# Altium PCB Bluetooth_tag_station.PcbDoc
Units mm, origin at the board's own origin, x right, y up, seen from the top; angles counter-clockwise.
Board outline 82 x 61.1 mm, 2 copper layers (Top Layer, Bottom Layer); 77 components, 55 nets, 281 pads, 208 vias.
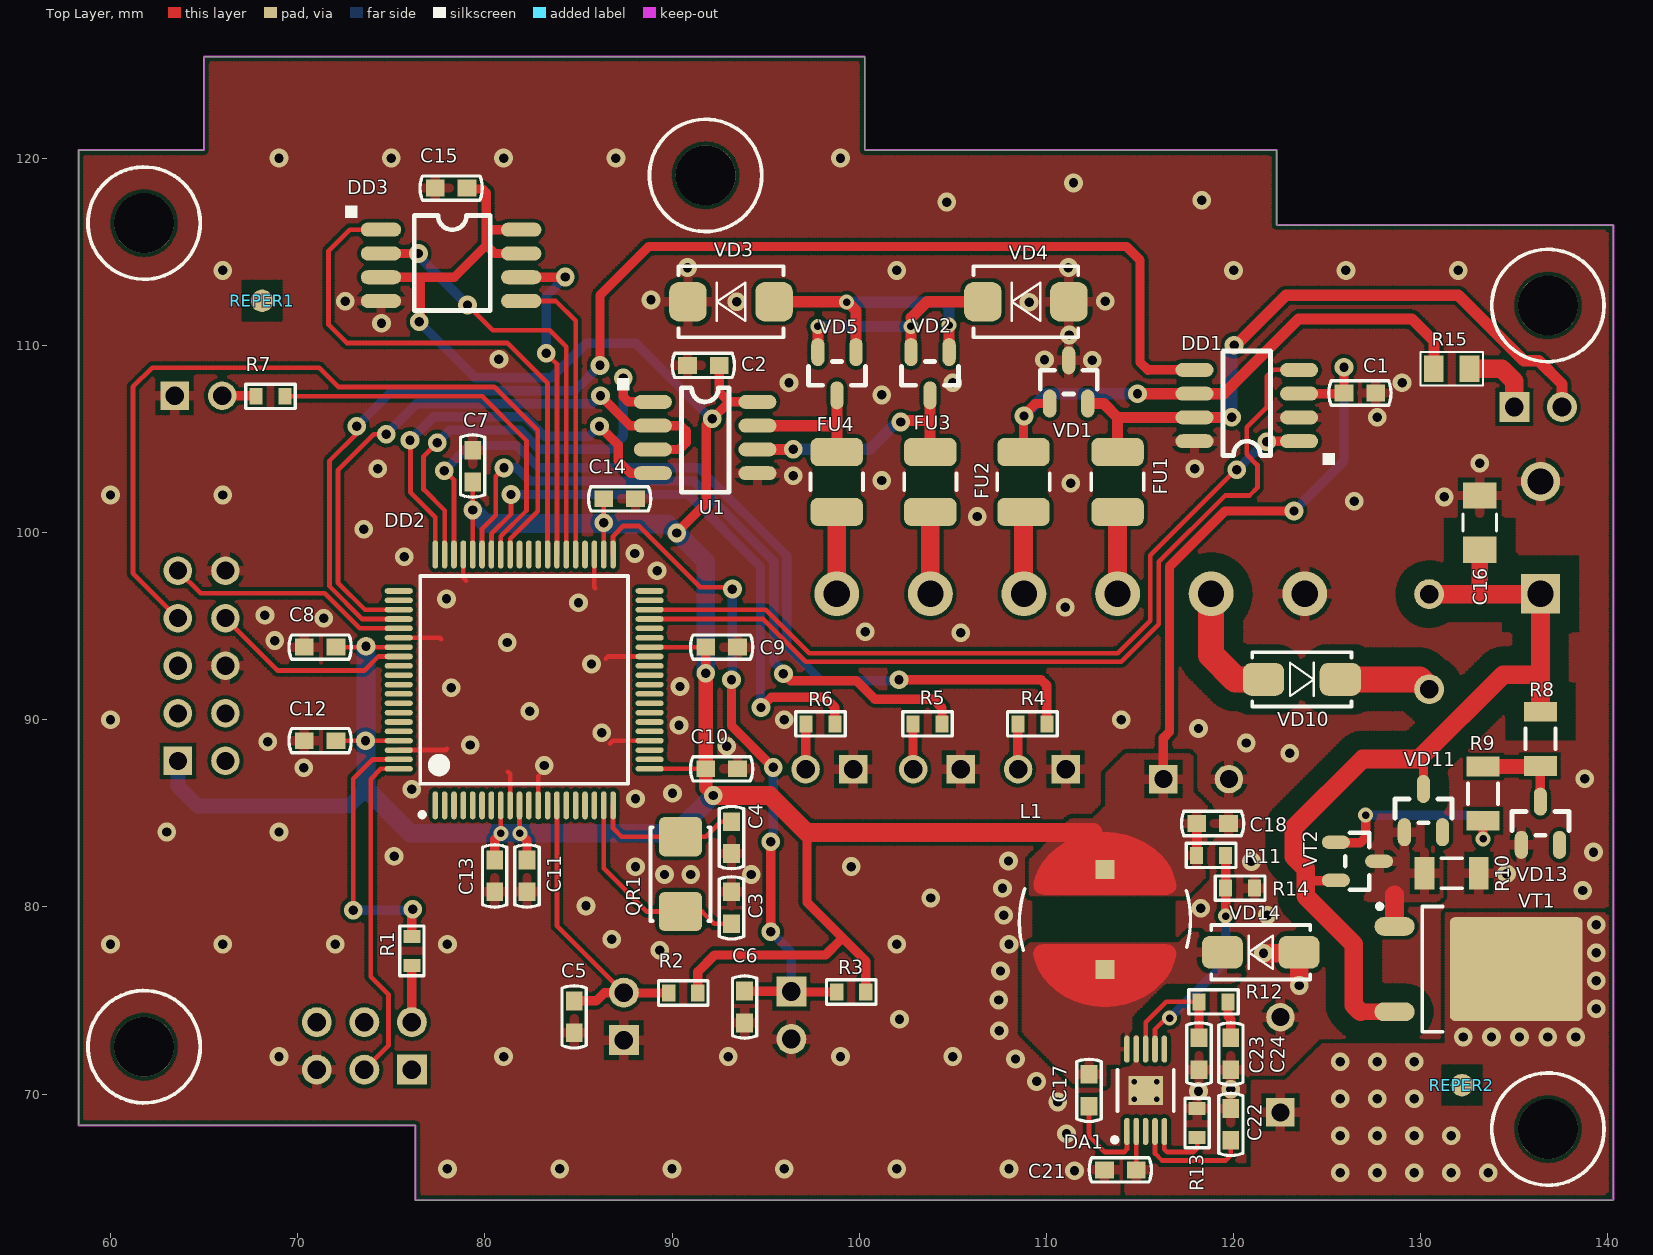
[diagram p0: Top Layer view]
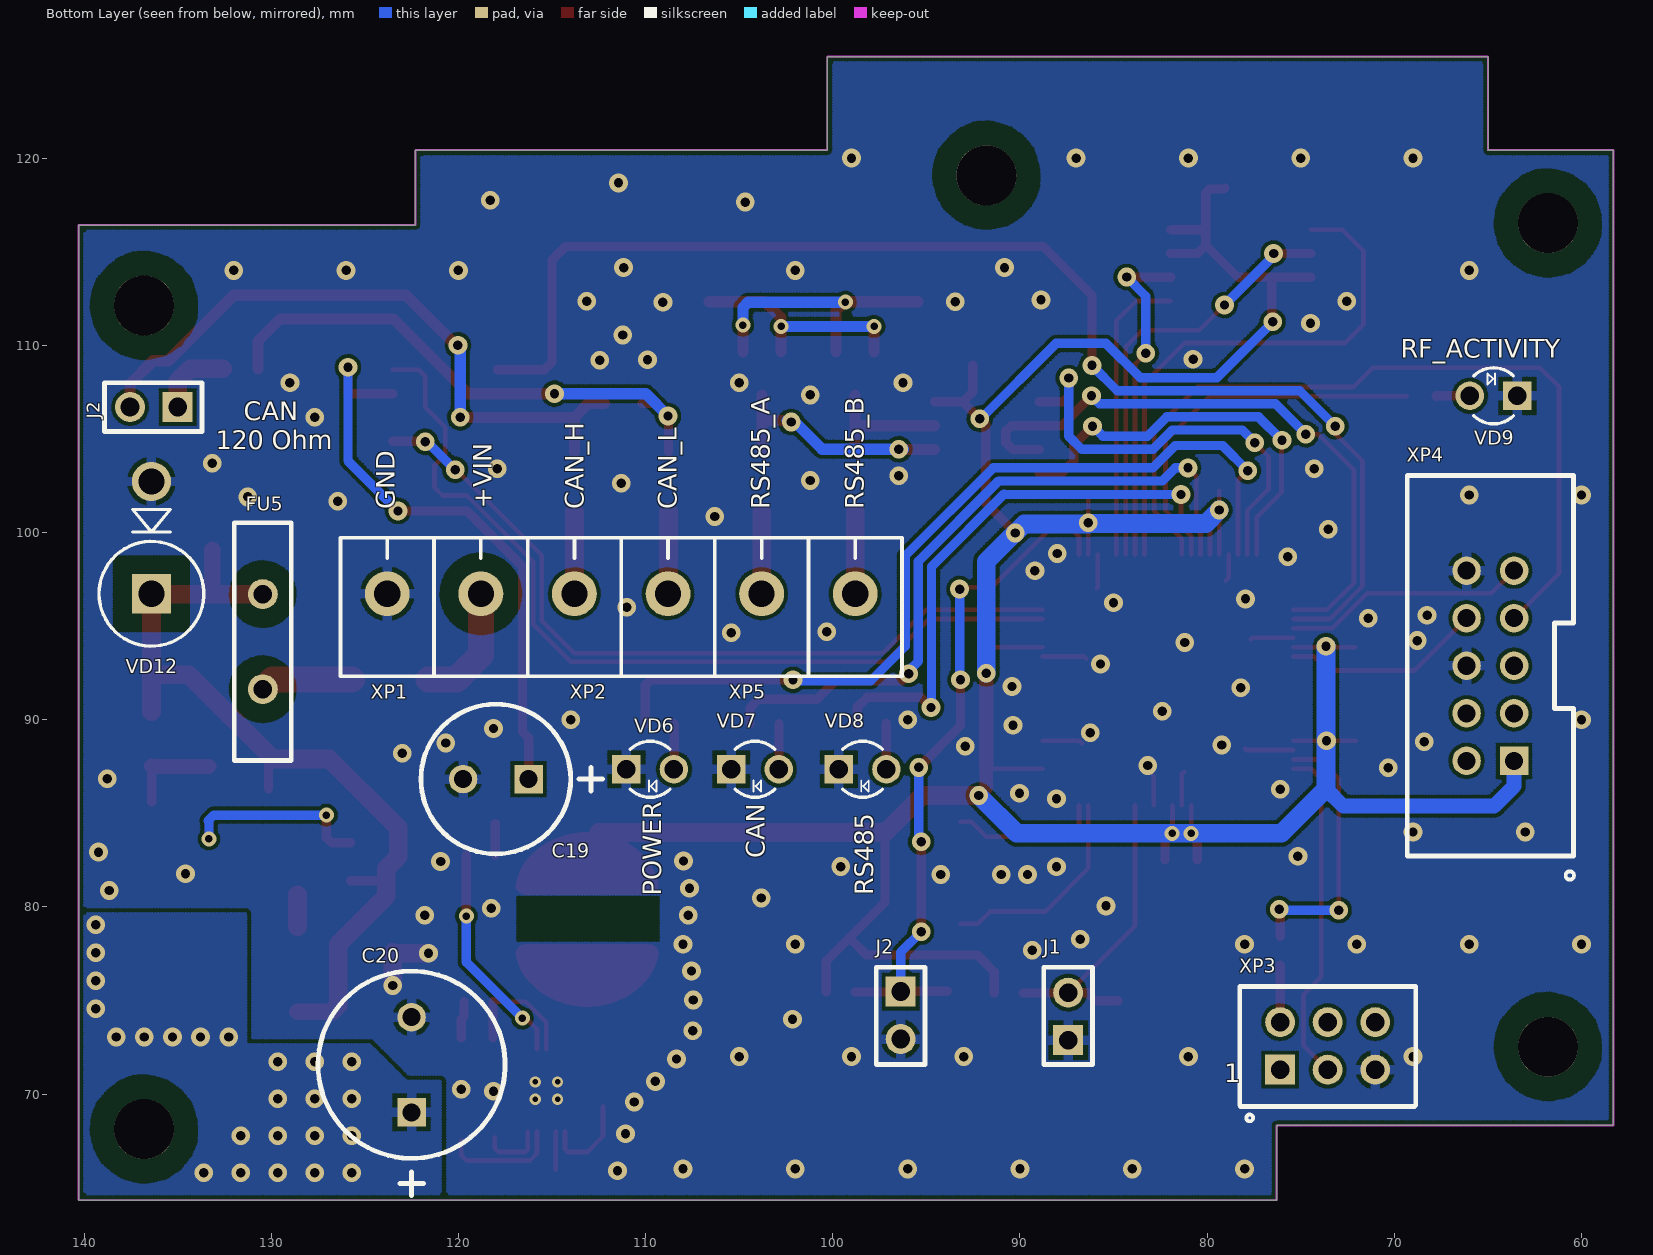
[diagram p1: Bottom Layer view, seen from below]

## Layer stack, top to bottom
Top Solder: solder mask 0.0102, Solder Resist, Dk 3.5
Top Layer: signal copper 0.0356
Dielectric 1: dielectric 0.32, FR-4, Dk 4.8
Bottom Layer: signal copper 0.0356
Bottom Solder: solder mask 0.0102, Solder Resist, Dk 3.5

## Board outline
58.293,68.326 58.293,120.426 64.993,120.426 64.993,125.426 100.293,125.426 100.293,120.426 122.293,120.426 122.293,116.426 140.293,116.426 140.293,64.326 76.293,64.326 76.293,68.326

## Design rules (kind name [scope] priority, off if disabled: settings)
Clearance Clearance_1 [InNet('VIN') OR InNet('NetFU5_1') OR InNet('NetC16_2')] p1: gap=1
Clearance [All] p2: gap=0.2
ComponentClearance [All] p1: gap=0.2 collisioncheckmode=3 verticalgap=2540 showdistances=FALSE
PolygonConnect PolygonConnect_1 [IsVia OR InComponent('VT1') OR InComponent('DA1') AND InNet('GND')] p1: connectstyle=Direct reliefconductorwidth=0.254 reliefentries=4 polygonreliefangle="90 Angle" airgapwidth=0.254
PolygonConnect [InComponent('DA1')] p2: connectstyle=Relief reliefconductorwidth=0.25 reliefentries=4 polygonreliefangle="90 Angle" airgapwidth=0.2
PolygonConnect PolygonConnect_2 [All] p3: connectstyle=Relief reliefconductorwidth=0.5 reliefentries=4 polygonreliefangle="90 Angle" airgapwidth=0.25
RoutingVias [All] p1: holewidth=0.4 width=0.8 viastyle="Through Hole" minholewidth=0.3 minwidth=0.6 maxholewidth=0.5 maxwidth=1
SolderMaskExpansion [All] p1: expansion=0.102
Width [All] p1: maxlimit=5 minlimit=0.2 preferedwidth=0.5
29 further rules are at their usual default settings.

## Classes and differential pairs
component class Interface: C1 C2 DD1 FU1 FU2 FU3 FU4 J2 R1 R15 U1 VD1 VD2 VD3 VD4 VD5 XP1 XP2 XP3 XP4 XP5
component class Main: C3 C4 C5 C6 C7 C8 C9 C10 C11 C12 C13 C14 C15 DD2 DD3 J1 J2 QR1 R2 R3 R4 R5 R6 R7 REPER1 REPER2 VD6 VD7 VD8 VD9
component class Power: C16 C17 C18 C19 C20 C21 C22 C23 C24 DA1 FU5 L1 R8 R9 R10 R11 R12 R13 R14 VD10 VD11 VD12 VD13 VD14 VT1 VT2

## Components (designator, comment, footprint, x,y, rotation, side; value= is the part's Value field where it differs from the comment)
C1 "0.1uF" CC0603 126.75,107.45 r180 top
C2 "0.1uF" CC0603 91.675,108.925 r180 top
C3 "22pF" CC0603 93.175,79.95 r270 top
C4 "22pF" CC0603 93.175,83.7 r90 top
C5 "200pF" CC0603 84.775,74.125 r90 top
C6 "200pF" CC0603 93.875,74.65 r270 top
C7 "0.1uF" CC0603 79.35,103.55 r270 top
C8 "0.1uF" CC0603 71.2,93.875 r0 top
C9 "0.1uF" CC0603 92.65,93.875 r180 top
C10 "0.1uF" CC0603 92.65,87.375 r180 top
C11 "0.1uF" CC0603 82.25,81.65 r90 top
C12 "0.1uF" CC0603 71.2,88.875 r0 top
C13 "0.1uF" CC0603 80.525,81.65 r90 top
C14 "0.1uF" CC0603 87.2,101.8 r180 top
C15 "0.1uF" CC0603 78.2,118.4 r180 top
C16 "0.1uFx250V" CC1206 133.15,100.525 r270 top
C17 "0.1 uF" CC0603 112.275,70.2 r270 top
C18 "0.1 uF" CC0603 118.875,84.45 r0 top
C19 "1000uFx6.3V" CC8X3.5 116.25,86.825 r0 bottom
C20 "470uFx35V" CC16X10_CAP0.5(1)(Primary) 122.5,69.025 r90 bottom
C21 "0.1 uF" CC0603 113.95,65.95 r180 top
C22 "10 nF" CC0603 119.85,68.375 r90 top
C23 "330pF" CC0603 118.15,72.15 r270 top
C24 "560pF" CC0603 119.85,72.15 r270 top
DA1 "TPS54260DGQ" S-PDSO-G10 114.3,68 r90 top
DD1 "SN65HVD232D" SO-8 123.5,104.875 r90 top
DD2 "LPC1754FBD80" TQFP-80_0.5 82.1,92.125 r90 top
DD3 "M25PE16" EIAJ_SO8 74.45,116.175 r0 top
FU1 "MICROSMD010F-2" RC1210 113.8,102.7 r270 top
FU2 "MICROSMD010F-2" RC1210 108.775,102.7 r270 top
FU3 "MICROSMD010F-2" RC1210 103.8,102.7 r270 top
FU4 "MICROSMD010F-2" RC1210 98.8,102.7 r270 top
FU5 "RXE-110" RXE-110 130.45,91.625 r90 bottom
J1 "PLS-02" PLS-02 87.425,72.875 r90 bottom
J2 "PLS-02" PLS-02 96.375,75.475 r270 bottom
J2 "PLS-02" PLS-02 135,106.7 r0 bottom
L1 "15uH" SDR0805 113.125,79.325 r90 top
QR1 "NX5032GA-12.000MHz LN-CD-1" AC5032_2 90.45,81.75 r90 top
R1 "100E" RC0603 76.1,77.65 r270 top
R2 "10k" RC0603 90.6,75.4 r0 top
R3 "10k" RC0603 99.575,75.45 r0 top
R4 "560E" RC0603 109.25,89.775 r0 top
R5 "560E" RC0603 103.65,89.775 r0 top
R6 "560E" RC0603 97.925,89.775 r0 top
R7 "560E" RC0603 68.55,107.275 r0 top
R8 "220k" RC1206 136.4,88.975 r90 top
R9 "220k" RC1206 133.325,86.05 r90 top
R10 "220k" RC1206 131.65,81.8 r180 top
R11 "31k6 1%" RC0603 118.8,82.75 r180 top
R12 "12k" RC0603 118.925,74.925 r180 top
R13 "240k" RC0603 118.05,68.45 r270 top
R14 "10k 1%" RC0603 120.35,81 r180 top
R15 "120E" RC0805 131.65,108.75 r180 top
REPER1 "REPER1.2" REPER1.2 68.1,112.375 r90 top
REPER2 "REPER1.2" REPER1.2 132.2,70.475 r90 top
U1 "ST3485EBDR" SO-8 88.975,106.975 r270 top
VD1 "PESD2CAN" SOT-23(123) 110.175,106.875 r270 top
VD2 "BAV99" SOT-23(GSD) 104.8,109.65 r180 top
VD3 "SMBJ5.0A" SMB 93.15,112.325 r0 top
VD4 "SMBJ5.0A" SMB 108.9,112.325 r0 top
VD5 "BAV99" SOT-23(GSD) 99.825,109.65 r180 top
VD6 "LED_3" LED3 111.025,87.35 r180 bottom
VD7 "LED_3" LED3 105.425,87.35 r180 bottom
VD8 "LED_3" LED3 99.675,87.35 r180 bottom
VD9 "LED_3" LED3 63.425,107.3 r0 bottom
VD10 "GS1M" SMA 123.65,92.15 r0 top
VD11 "BZX84C15" SOT-23(123) 129.125,83.975 r270 top
VD12 "1.5KE150A" DO-201 136.4,102.725 r270 bottom
VD13 "BZX84C36" SOT-23(123) 135.375,83.3 r270 top
VD14 "SK34SMA" SMA 121.45,77.575 r180 top
VT1 "IRFR9220" D-PAK(TO-252AA) 133.1,76.675 r0 top
VT2 "BC807-40LT3G" SOT-23(123) 125.45,83.45 r180 top
XP1 "DG306-5.0 2PIN" DG306-5.0 123.8,96.725 r180 bottom
XP2 "DG306-5.0 2PIN" DG306-5.0 113.8,96.725 r180 bottom
XP3 "PLD-06" PIN6 76.1,71.3 r180 bottom
XP4 "BH-10" BH-10 63.6,87.8 r90 bottom
XP5 "DG306-5.0 2PIN" DG306-5.0 103.8,96.725 r180 bottom

## Footprints (in the part's own frame and the unit in brackets; to place one, negate y for a bottom-side part, rotate by r counter-clockwise, add the part's x,y. Pads: shape width x height; smd on the part's side, far side on the other; paste and mask are expansions set on the pad)
AC5032_2 [mm]
  rrect30% 2.1x2.3 smd: 1(-2,0) 2(2,0)
  silkscreen extent -2.5,-1.6 2.5,1.6
BH-10 [mil]
  rect 60x60 hole 38: 1(0,0)
  round 60 hole 38: 2(0,100) 3(100,0) 4(100,100) 5(200,0) 6(200,100) 7(300,0) 8(300,100) 9(400,0) 10(400,100)
  silkscreen extent -200,-125 600,225
CC8X3.5 [mil]
  rect 60x60 hole 38: 1(0,0)
  round 60 hole 38: 2(137.8,0)
  silkscreen extent -156,-157 226,157
CC16X10_CAP0.5(1)(Primary) [mil]
  round 60 hole 38: 1(200,0)
  rect 60x60 hole 38: 2(0,0)
  silkscreen extent -175,-197 297,197
CC0603 [mm]
  rect 1x0.9 smd paste-25.4: 1(-0.85,0) 2(0.85,0)
  silkscreen extent -1.66,-0.65 1.66,0.65
CC1206 [mm]
  rect 1.4x1.8 smd paste-25.4: 1(-1.45,0) 2(1.45,0)
  silkscreen extent -0.45,-0.9 0.45,0.9
D-PAK(TO-252AA) [mm]
  oval 2.15x1 smd: 1(-4.5,2.28) 2(-4.5,-2.28)
  rrect10% 7.1x5.55 smd: 3(2,0)
  silkscreen extent -5.42,-3.35 -1.92,3.47
DG306-5.0 [mm]
  round 2.4 hole 1.4: 1(0,0) 2(5,0)
  silkscreen extent -2.5,-4.4 7.5,3, body extent -2.6,-4.5 7.4,3.1, height 10.5
DO-201 [mm]
  round 2.1 hole 1.4: 1(0,0)
  rect 2.1x2.1 hole 1.4: 2(6,0)
  silkscreen extent 1.5,-2.8 8.8,2.8
EIAJ_SO8 [mil]
  oval 85x29.53 smd: 1(0,0) 2(0,-50) 3(0,-100) 4(0,-150) 5(295,-150) 6(295,-100) 7(295,-50) 8(295,0)
  silkscreen extent -75,-170 230,50
LED3 [mil]
  rect 60x60 hole 39: 1(0,0)
  round 60 hole 39: 2(100,0)
  silkscreen extent 8,-59 92,59
PIN6 [mm]
  rect 1.6x1.6 hole 1: 1(0,0)
  round 1.6 hole 1: 2(0,2.54) 3(2.54,0) 4(2.54,2.54) 5(5.08,0) 6(5.08,2.54)
  silkscreen extent -2.16,-1.96 7.24,4.44
PLS-02 [mm]
  rect 1.6x1.6 hole 1: 1(0,0)
  round 1.6 hole 1: 2(2.54,0)
  silkscreen extent -1.3,-1.3 3.9,1.3
RC0603 [mm]
  rect 0.7x0.9 smd paste-25.4: 1(-0.775,0) 2(0.774,0)
  silkscreen extent -1.32,-0.65 1.33,0.65
RC0805 [mm]
  rect 1.05x1.4 smd paste-25.4: 1(-0.95,0) 2(0.95,0)
  silkscreen extent -1.67,-0.89 1.67,0.89
RC1206 [mm]
  rect 1.05x1.75 smd paste-25.4: 1(-1.45,0) 2(1.45,0)
  silkscreen extent -0.55,-0.8 0.55,0.8
RC1210 [mm]
  rrect50% 1.5x2.8 smd: 1(-1.6,0) 2(1.6,0)
  silkscreen extent -0.45,-1.4 0.45,1.4
REPER1.2 [mm]
  round 1.2 smd paste-25.4 mask-25.4: 1(0,0)
  Top Layer pour cut-out: -1.2,-1.2 1.2,-1.2 1.2,1.2 -1.2,1.2
RXE-110 [mm]
  round 1.6 hole 1: 1(0,0) 2(5.08,0)
  silkscreen extent -3.81,-1.52 8.89,1.52
S-PDSO-G10 [mm]
  oval 1.45x0.3 smd: 1(0,0) 2(0,-0.5) 3(0,-1) 4(0,-1.5) 5(0,-2) 6(4.4,-2) 7(4.4,-1.5) 8(4.4,-1) 9(4.4,-0.5) 10(4.4,0)
  rect 1.55x1.85 smd: 11(2.2,-1)
  silkscreen extent -0.57,-2.5 3.3,0.77
SDR0805 [mm]
  rect 1x1 smd paste-25.4 mask-25.4: 1(-2.667,0) 2(2.667,0)
  Top Layer region: 1.327,-3.319 1.362,-3.503 1.461,-3.66 1.612,-3.771 1.792,-3.818 1.977,-3.797 2.318,-3.69 2.706,-3.535 3.065,-3.321 3.387,-3.053 3.392,-3.047 3.771,-2.627 4.09,-2.16 4.345,-1.654 4.53,-1.119 4.642,-0.565 4.68,0 4.642,0.565 4.53,1.119 4.345,1.654 4.09,2.16 3.771,2.627 3.392,3.047 3.381,3.059 3.063,3.323 2.709,3.534 2.325,3.688 1.996,3.791 1.806,3.813 1.62,3.764 1.465,3.65 1.363,3.488 1.327,3.299
  Top Layer region: -1.327,3.319 -1.362,3.503 -1.461,3.66 -1.612,3.771 -1.792,3.818 -1.977,3.797 -2.318,3.69 -2.706,3.535 -3.065,3.321 -3.387,3.053 -3.392,3.047 -3.771,2.627 -4.09,2.16 -4.345,1.654 -4.53,1.119 -4.642,0.565 -4.68,0 -4.642,-0.565 -4.53,-1.119 -4.345,-1.654 -4.09,-2.16 -3.771,-2.627 -3.392,-3.047 -3.381,-3.059 -3.063,-3.323 -2.709,-3.534 -2.325,-3.688 -1.996,-3.791 -1.806,-3.813 -1.62,-3.764 -1.465,-3.65 -1.363,-3.488 -1.327,-3.299
  silkscreen extent -1.66,-4.57 1.64,4.57
SMA [mm]
  rrect50% 2.2x1.75 smd: 1(-2.05,0) 2(2.05,0)
  silkscreen extent -2.65,-1.45 2.65,1.45
SMB [mm]
  rrect50% 2x2.1 smd: 1(2.3,0) 2(-2.3,0)
  silkscreen extent -2.8,-1.9 2.8,1.9
SO-8 [mil]
  oval 29.53x80 smd: 1(0,0) 2(50,0) 3(100,0) 4(150,0) 5(150,220) 6(100,220) 7(50,220) 8(0,220)
  silkscreen extent -50,-75 190,160
SOT-23(123) [mil]
  oval 59.06x28.07 smd: 1(-0.5,0) 2(-0.5,80) 3(-91.5,40)
  silkscreen extent -71,-20 -21,100
SOT-23(GSD) [mil]
  oval 28.07x59.06 smd: 1(0,0.5) 2(80,0.5) 3(40,91.5)
  silkscreen extent -20,21 100,71
TQFP-80_0.5 [mm]
  oval 1.5x0.3 smd: 1(-6.7,4.75) 2(-6.7,4.25) 3(-6.7,3.75) 4(-6.7,3.25) 5(-6.7,2.75) 6(-6.7,2.25) 7(-6.7,1.75) 8(-6.7,1.25) 9(-6.7,0.75) 10(-6.7,0.25) 11(-6.7,-0.25) 12(-6.7,-0.75) 13(-6.7,-1.25) 14(-6.7,-1.75) 15(-6.7,-2.25) 16(-6.7,-2.75) 17(-6.7,-3.25) 18(-6.7,-3.75) 19(-6.7,-4.25) 20(-6.7,-4.75) 41(6.7,-4.75) 42(6.7,-4.25) 43(6.7,-3.75) 44(6.7,-3.25) 45(6.7,-2.75) 46(6.7,-2.25) 47(6.7,-1.75) 48(6.7,-1.25) 49(6.7,-0.75) 50(6.7,-0.25) 51(6.7,0.25) 52(6.7,0.75) 53(6.7,1.25) 54(6.7,1.75) 55(6.7,2.25) 56(6.7,2.75) 57(6.7,3.25) 58(6.7,3.75) 59(6.7,4.25) 60(6.7,4.75)
  oval 0.3x1.5 smd: 21(-4.75,-6.7) 22(-4.25,-6.7) 23(-3.75,-6.7) 24(-3.25,-6.7) 25(-2.75,-6.7) 26(-2.25,-6.7) 27(-1.75,-6.7) 28(-1.25,-6.7) 29(-0.75,-6.7) 30(-0.25,-6.7) 31(0.25,-6.7) 32(0.75,-6.7) 33(1.25,-6.7) 34(1.75,-6.7) 35(2.25,-6.7) 36(2.75,-6.7) 37(3.25,-6.7) 38(3.75,-6.7) 39(4.25,-6.7) 40(4.75,-6.7) 61(4.75,6.7) 62(4.25,6.7) 63(3.75,6.7) 64(3.25,6.7) 65(2.75,6.7) 66(2.25,6.7) 67(1.75,6.7) 68(1.25,6.7) 69(0.75,6.7) 70(0.25,6.7) 71(-0.25,6.7) 72(-0.75,6.7) 73(-1.25,6.7) 74(-1.75,6.7) 75(-2.25,6.7) 76(-2.75,6.7) 77(-3.25,6.7) 78(-3.75,6.7) 79(-4.25,6.7) 80(-4.75,6.7)
  silkscreen extent -7.32,-5.55 5.55,5.57

## Part data
C1 C2 C3 C4 C5 C6 C7 C8 C9 C10 C11 C12 C13 C14 C15 C17 C18 C21 C22 C23 C24: library part CC0603, "CC0603"
C16: library part CC1206, "CC1206"
C19: library part CAP0.35, "CAP0.35"
C20: library part CAP0.5(1), "CAP0.5(1)"
DD1: library part SN65HVD234D, "CAN Transceiver"
DD2: "Cortex -M3 32-Bit Microcontroller, 128KB Flash, 64KB RAM, 800-Lead LQFP"
DD3: library part S25FL016A0LMFI01, "S25FL016A0LMFI01"
FU1 FU2 FU3 FU4: library part MICROSMD, "MICROSMD"
L1: library part SDR0805, "SDR0805"
QR1: library part AC5032_2, "AC5032/2"
R1 R2 R3 R4 R5 R6 R7 R11 R12 R13 R14: library part RC0603, "RC0603"
R8 R9 R10: library part RC1206, "RC1206"
R15: library part RC0805, "RC0805"
VD1: "TVS for CAN"
VD2 VD5: "1.0 Ampere General Purpose Rectifier"
VD3 VD4: library part SMBJ, "SMBJ"
VD11 VD13: library part BZX84, "Zener Voltage Regulator Diode"
VD12: library part 1.5KE, "1.5KE"
VD14: "Schottky Rectifier"
VT1: "HEXFET Power MOSFET"
VT2: library part BC856B, "BC856B"
XP3: "PLD06"

## Free pads (board coordinates)
  round 3.2 hole 3.2 unplated: 0(61.793,72.526) 0(61.793,116.526) 0(91.793,119.076) 0(136.793,68.126) 0(136.793,112.126)

## Via types
v1: diameter 1, hole 0.5, Top Layer to Bottom Layer, 194 vias
v2: diameter 0.8, hole 0.4, Top Layer to Bottom Layer, 10 vias
v3: diameter 0.6, hole 0.3, Top Layer to Bottom Layer, 4 vias

## Nets (pads, with @x,y where several pads share a name; then routed paths per layer and width w, separated by ;. In a path a pad name is that pad's centre, name@x,y a point inside that pad or via, vN(x,y) a via of type N, cw(c..) or ccw(c..) an arc to the next point about the centre after c; other vN are vias at no path point)
485_LED: DD2.54 R6.2 | length 32.6
  Top Layer w0.25: DD2.54 80.35,99.936 81.4,100.986 81.4,102.289 81.664,102.025 v1(81.4,102.025)
  Top Layer w0.5: v1(94.75,90.65) 95.3,91.2 98.15,91.2 98.699,90.651 R6.2 R6.2@98.75,89.826
  Bottom Layer w0.5: v1(81.4,102.025) 90.825,102.025 90.85,102.05 94.725,98.175 94.725,90.575 94.75,90.55 v1(94.75,90.65)
+3V3: C1.2 C2.1 C7.2 C8.2 C9.2 C10.2 C11.2 C12.2 C13.2 C14.2 C15.1 C18.1 C19.1 DD1.3 DD2.8 DD2.10 DD2.21 DD2.34 DD2.42 DD2.56 DD2.67 DD2.77 DD3.3 DD3.7 DD3.8 L1.2 R2.2 R3.2 R11.2 U1.8 XP4.1 | length 215.2
  Top Layer w0.25: C12.2 DD2.77 ; C8.2@72.1,93.875 DD2.67 ; DD2.56 C7.2@79.35,102.225 ; v2(80.85,83.925) DD2.8 ; DD2.10 81.85,83.95 v2(81.875,83.925) ; DD2.42 C14.2@86.35,101.875 ; DD2.21 C10.2 ; DD2.34 C9.2
  Top Layer w0.5: DD3.3 76.55,113.635 ; v1(76.5,111.25) 76.55,111.3 76.55,113.635 ; C15.1 79.1,118.35 79.875,118.35 80.075,118.15 80.075,115.9 ; C13.2 80.525,83.6 v2(80.85,83.925) ; v2(81.875,83.925) 82.25,83.55 C11.2 ; DD3.7 80.52,114.905 80.075,115.35 ; DD3.8 80.35,116.175 80.075,115.9 ; v1(90.25,99.975) 90.25,100 91.825,101.575 91.825,105.75 v1(92.15,106.075) 93.05,106.975 ; R2.2 91.374,76.524 92.275,77.425 98.2,77.425 99.013,78.238 99.013,78.437 ; v1(91.8,92.475) C9.2 ; C2.1 92.525,107.5 93.05,106.975 ; U1.8 93.05,106.975 ; 97.208,83.967 97.208,80.242 99.013,78.437 ; R3.2 100.349,77.101 99.013,78.437 ; C19.1 116.25,89.025 116.575,89.35 116.575,98.187 119.538,101.15 v1@123.175,101.15 ; R11.2 C18.1 ; DD1.3 125.865,107.415 C1.2 v1(125.9,108.825) ; 76.55,113.635 78.36,113.635 80.075,115.35 ; 80.075,115.35 80.075,115.9
  Top Layer w0.7: C10.2 91.8,86.35 v1(92.2,85.95)
  Top Layer w0.8: C10.2 v1(91.8,92.475)
  Top Layer w1: v1(92.2,85.95) 95.225,85.95 97.208,83.967 112.5,83.967
  Bottom Layer w0.5: v1(76.5,111.25) 79.475,108.275 83.575,108.275 85.4,110.1 88.075,110.1 92.1,106.075 v1(92.15,106.075) ; v1(123.225,101.15) 125.9,103.825 v1(125.9,108.825)
  Bottom Layer w0.8: XP4.1 63.6,86.45 64.675,85.375 72.725,85.375 73.65,86.3
  Bottom Layer w1: v1(73.65,93.925) 73.65,86.3 76.025,83.925 v2(80.85,83.925) v2(81.875,83.925) 90.175,83.925 v1(92.2,85.95) ; v1(79.35,101.2) 80.075,100.475 86.325,100.475 86.35,100.45 89.775,100.45 v1(90.25,99.975) ; v1@90.262,99.988 91.8,98.45 v1(91.8,92.475)
  other v1: 73.625,88.875 86.35,100.525
CAN_D: DD1.1 DD2.38 | length 42.4
  Top Layer w0.25: DD2.38 95.011,95.875 97.336,93.55 113.814,93.55 115.55,95.286 115.55,98.775 120.125,103.35 v1(120.175,103.35)
  Top Layer w0.5: v1(121.775,104.85) 121.8,104.875 DD1.1
  Bottom Layer w0.5: v1(120.175,103.35) 121.675,104.85 v1(121.775,104.85)
CAN_EN: DD1.5 DD2.64 | length 70.4
  Top Layer w0.25: v1(73.15,105.675) 73.15,105.275 71.7,103.825 71.7,97.136 73.461,95.375 DD2.64
  Top Layer w0.5: v1(86.15,108.925) 86.15,112.675 88.75,115.275 114.275,115.275 115,114.55 115,109.1 115.425,108.675 115.435,108.685 DD1.5
  Bottom Layer w0.5: v1(73.15,105.675) 75.05,107.575 84.8,107.575 v1(86.15,108.925)
CAN_H: FU1.2 XP2.1 | length 4.4
  Top Layer w1: XP2.1 FU1.2
CAN_L: FU2.2 XP2.2 | length 4.4
  Top Layer w1: XP2.2@108.775,96.75 FU2.2
CAN_LED: DD2.55 R5.2 | length 37.9
  Top Layer w0.25: DD2.55 79.85,100.2 80.575,100.925 80.575,103 v1(81.025,103.45)
  Top Layer w0.5: v1(95.95,92.45) 96.325,92.075 99.85,92.075 100.825,91.1 103.95,91.1 104.424,90.626 R5.2
  Bottom Layer w0.5: v1(81.025,103.45) 81.7,103.45 82.4,102.75 91.14,102.75 95.425,98.465 95.425,93.125 95.95,92.6 v1(95.95,92.45)
CAN_R: DD1.4 DD2.37 | length 47.7
  Top Layer w0.25: DD2.37 94.875,95.375 97.15,93.1 114,93.1 116,95.1 116,98.425 119.55,101.975 120.85,101.975 121.275,102.4 121.275,103.6 120.7,104.175 120.7,105.625 121.762,106.688 121.762,108.337 122.11,108.685 DD1.4
GND: C1.1 C2.2 C3.1 C4.1 C5.1 C6.2 C7.1 C8.1 C9.1 C10.1 C11.1 C12.1 C13.1 C14.1 C15.2 C16.1 C18.2 C19.2 C20.1 C21.2 C22.2 C23.2 C24.2 DA1.9 DA1.11 DD1.2 DD1.8 DD2.9 DD2.12 DD2.24 DD2.33 DD2.43 DD2.57 DD2.66 DD2.78 DD3.4 J1.1 J2.2@96.375,72.935 R10.1 R13.1 R14.1 U1.5 VD1.3 VD3.2 VD4.1 VD6.1 VD7.1 VD8.1 VD9.1 VD12.1 VD13.1 VD14.1 XP1.1 XP3.5 XP4.6 XP4.10 | length 19.9
  Top Layer w0.25: DD2.78 77.9,88.375 77.975,88.45 ; DD2.66 77.6,94.375 77.675,94.3 ; DD2.57 78.85,97.575 79,97.425 ; 81.225,87.225 81.35,87.1 DD2.9 ; DD2.12 82.85,86.975 82.875,87 ; DD2.43 85.85,97.075 85.9,97.025 ; 86.45,93.25 86.575,93.375 DD2.33 ; 86.675,88.725 86.825,88.875 DD2.24
  Top Layer w1: v1(121.6,77.525) 123.45,77.525 VD14.1 v1(123.5,75.8)
  other v1: 111.5,65.9 78,66 84,66 90,66 96,66 102,66 108,66 111.075,67.875 110.6,69.575 118.125,70.15 119.85,70.263 109.475,70.675 108.35,71.875 69,72 81,72 93,72 99,72 105,72 107.475,73.375 102.15,74 107.45,75.025 107.55,76.575 89.35,77.675 60,78 66,78 72,78 78,78 102,78 108,78 86.775,78.275 107.725,79.55 121.8,79.55 118.25,79.925 85.4,80.05 103.825,80.475 138.65,80.875 107.65,81 89.6,81.725 91,81.725 94.225,81.725 134.575,81.775 88.05,82.138 99.575,82.15 120.95,82.425 107.975,82.45 75.15,82.7 139.225,82.925 63,84 69,84 88.05,85.775 90.025,86.075 76.1,86.275 138.759,86.85 70.325,87.425 83.175,87.55 123,88.2 92.925,88.575 79.225,88.65 120.675,88.75 68.4,88.825 86.25,89.3 118.125,89.525 90.375,89.7 60,90 96,90 114,90 82.4,90.45 78.2,91.7 90.425,91.775 85.7,92.975 81.2,94.125 68.775,94.225 105.425,94.65 100.325,94.7 71.4,95.412 68.25,95.575 111,96 85,96.25 77.95,96.45 89.2,97.95 75.7,98.7 88,98.875 73.525,100.175 106.3,100.85 126.45,101.675 131.25,101.9 60,102 66,102 111.3,102.625 101.2,102.775 96.475,103.025 74.275,103.4 117.925,103.4 133.15,103.7 127.675,106.15 101.2,107.35 96.25,108 105,108 129,108 112.45,109.2 109.9,109.225 80.75,109.25 111.225,110.55 74.475,111.175 109.075,112.3 93.45,112.325 72.548,112.35 113.15,112.35 88.875,112.425 66,114 102,114 120,114 126,114 132,114 90.825,114.15 111.175,114.15 104.675,117.65 118.3,117.75 111.45,118.675 69,120 75,120 81,120 87,120 99,120
  other v3: 114.7,69.725 115.9,69.725 114.7,70.65 115.9,70.65
MISO: DD2.46 DD3.2 | length 23.3
  Top Layer w0.25: v1(79.075,112.15) 80.425,110.8 83.475,110.8 84.35,109.925 DD2.46
  Top Layer w0.5: DD3.2 74.455,114.9 v1(76.45,114.9)
  Bottom Layer w0.5: v1(76.45,114.9) 76.375,114.975 76.375,114.85 v1(79.075,112.15)
MOSI: DD2.45 DD3.5 | length 15.8
  Top Layer w0.25: DD3.5 83.785,112.365 84.85,111.3 DD2.45
NetC3_2: C3.2 DD2.19 QR1.1 | length 11.4
  Top Layer w0.25: DD2.19 86.35,82.05 88.65,79.75 QR1.1 91.6,79.75 92.25,79.1 C3.2
NetC4_2: C4.2 DD2.20 QR1.2 | length 8.1
  Top Layer w0.25: DD2.20 86.85,84.2 87.3,83.75 QR1.2 91.8,83.75 92.6,84.55 C4.2
NetC5_2: C5.2 DD2.14 J1.2 R2.1 | length 16.7
  Top Layer w0.25: DD2.14 83.85,78.99 J1.2
  Top Layer w0.5: C5.2 85.95,74.975 86.39,75.415 J1.2 87.44,75.4 R2.1
NetC16_2: C16.2 FU5.2 R8.2 VD11.3 VD12.2 VT1.2 VT2.2 | length 47.9
  Top Layer w0.5: 123.907,81.393 VT2.2@125.763,81.393 ; 129.9,87.9 130.141,87.659 VD11.3
  Top Layer w0.9: 126.775,74.395 VT1.2 ; 133.075,96.705 133.15,96.78 C16.2
  Top Layer w1: 123.85,81.45 123.85,82.044 123.213,82.681 123.213,84.219 126.894,87.9 129.9,87.9 134.4,92.4 136.4,92.4 ; 123.907,81.393 123.85,81.393 123.85,80.575 126.425,78 126.425,74.745 126.775,74.395 ; FU5.2 133.075,96.705 136.38,96.705 VD12.2 136.4,92.4 ; R8.2 136.4,92.4
NetC17_1: C17.1 DA1.10 L1.1 VD14.2
NetC17_2: C17.2 DA1.1 | length 5
  Top Layer w0.25: C17.2 112.275,67.75 113.125,66.9 114.15,66.9 114.3,67.05 DA1.1
NetC22_1: C22.1 DA1.4 | length 6.3
  Top Layer w0.25: DA1.4 115.8,66.825 116.175,66.45 119.575,66.45 119.85,66.725 C22.1
NetC23_1: C23.1 DA1.8 R12.2 | length 6.7
  Top Layer w0.25: DA1.8 115.3,73.825 116.4,74.925 R12.2
  Top Layer w0.5: C23.1 R12.2
NetC24_1: C24.1 R12.1 | length 2
  Top Layer w0.5: R12.1 119.7,74.15 119.85,74 C24.1
NetDA1_5: DA1.5 R13.2 | length 3.4
  Top Layer w0.25: DA1.5 116.3,67.05 116.45,66.9 117.85,66.9 118.05,67.1 R13.2
NetDA1_7: DA1.7 R11.1 R14.2 | length 12
  Top Layer w0.25: DA1.7 115.8,73.45 116.404,74.054 v2(116.581,74.054)
  Top Layer w0.5: v2(119.575,79.5) R11.1
  Bottom Layer w0.5: v2(116.581,74.054) 119.575,77.048 v2(119.575,79.5)
NetDD1_6: DD1.6 FU2.1 R15.2 VD1.1 | length 29.6
  Top Layer w0.5: FU2.1 v1@108.775,106.225 ; v1@108.775,106.25 109.413,106.888 VD1.1
  Top Layer w0.6: v1(114.865,107.415) DD1.6 119.49,107.415 123.475,111.4 129.525,111.4 130.7,110.225 R15.2
  Bottom Layer w0.6: v1(108.8,106.225) 109.99,107.415 v1(114.865,107.415)
NetDD1_7: DD1.7 FU1.1 J2.2@137.54,106.7 VD1.2 | length 35.6
  Top Layer w0.6: VD1.2 113.062,106.888 113.8,106.15 FU1.1 ; 113.805,106.145 DD1.7 119.895,106.145 v1(119.9,106.15) ; v1(120.025,110) 120.125,110 122.8,112.675 132,112.675 135.5,109.175 136.3,109.175 137.54,107.935 J2.2@137.54,106.7
  Bottom Layer w0.6: v1@119.9,106.1 119.9,109.875 v1(120.025,110)
NetFU3_1: FU3.1 U1.6 VD2.3 | length 12.9
  Top Layer w0.6: U1.6 96.21,104.435 v1@96.225,104.45 ; v1@102.45,105.975 103.759,105.975 103.784,105.95 ; VD2.3 103.784,105.95 ; FU3.1 103.784,104.316 103.784,105.95
  Bottom Layer w0.6: v1@96.225,104.45 100.575,104.45 102.1,105.975 v1@102.45,105.975
  other v1: 96.475,104.45 102.225,105.9
NetFU4_1: FU4.1 U1.7 VD5.3 | length 7.2
  Top Layer w0.6: U1.7 98.764,105.705 ; FU4.1 98.809,104.309 VD5.3
NetFU5_1: FU5.1 VD10.2 | length 5
  Top Layer w1.4: VD10.2 129.925,92.15 FU5.1
NetJ2_1: J2.1@135,106.7 R15.1 | length 4.1
  Top Layer w1: R15.1 134.325,108.75 135,108.075 J2.1@135,106.7
NetR1_2: R1.2 XP3.2 | length 3
  Top Layer w0.5: XP3.2 R1.2
NetR4_1: R4.1 VD6.2 | length 2.4
  Top Layer w0.5: R4.1 108.475,87.36 VD6.2
NetR5_1: R5.1 VD7.2 | length 2.4
  Top Layer w0.5: R5.1 102.875,87.36 VD7.2
NetR6_1: R6.1 VD8.2 | length 2.5
  Top Layer w0.5: VD8.2 97.15,87.365 R6.1@97.15,89.8
NetR7_1: R7.1 VD9.2 | length 1.8
  Top Layer w0.5: VD9.2 67.75,107.3 R7.1
NetR8_1: R8.1 R9.2 VD13.3 | length 5
  Top Layer w0.5: VD13.3 R8.1@136.391,87.516
  Top Layer w0.8: R9.2 136.375,87.5 136.391,87.516 R8.1
NetR9_1: R9.1 VT2.1 | length 11
  Top Layer w0.5: VT2.1@125.763,83.425 126.775,83.425 127.05,83.7 v2(127.05,84.9) ; v2(133.325,83.625) R9.1
  Bottom Layer w0.5: v2(127.05,84.9) 133.075,84.9 133.375,84.6 133.325,84.55 v2(133.325,83.625)
NetR10_2: R10.2 VD11.1 VT1.1 VT2.3 | length 1.7
  Top Layer w1: VT1.1 128.6,80.65
NetVD2_1: VD2.1 VD3.1 VD5.1 | length 14.7
  Top Layer w0.6: VD3.1 v2@99.325,112.325 ; v2@99.35,112.325 99.825,111.85 VD5.1 ; VD2.1 v2(104.8,111.075)
  Bottom Layer w0.6: v2(99.325,112.3) 104.525,112.3 104.8,112.025 v2(104.8,111.075)
NetVD2_2: VD2.2 VD4.2 VD5.2 | length 11.9
  Top Layer w0.6: VD5.2 v2(97.793,111.007) ; VD2.2 v2@102.768,111.007 ; 102.768,111.468 103.625,112.325 VD4.2
  Bottom Layer w0.6: v2(97.793,111.007) v2(102.761,111.007)
PWR_LED: DD2.58 R4.2 | length 48
  Top Layer w0.25: v1(77.825,103.3) 77.875,103.3 78.35,102.825 DD2.58
  Top Layer w0.5: v1(102.125,92.125) 109.725,92.125 110.025,91.825 R4.2@110.025,89.776
  Bottom Layer w0.5: v1(77.825,103.3) 79.175,104.65 81.7,104.65 82.9,103.45 91.43,103.45 96.125,98.755 96.125,93.925 97.975,92.075 101.9,92.075 102.125,92.3 v1(102.125,92.125)
RESET: DD2.52 XP4.7 | length 44
  Top Layer w0.25: XP4.7 61.2,97.82 61.2,107.775 62.225,108.8 71.15,108.8 72.175,107.775 80.5,107.775 82.825,105.45 82.825,101.139 81.35,99.664 DD2.52
RF_LED: DD2.53 R7.2 | length 20.5
  Top Layer w0.25: R7.2 79.85,107.275 82.225,104.9 82.225,101.175 80.85,99.8 DD2.53
RF_RX: DD2.68 XP4.8 | length 10.7
  Top Layer w0.25: XP4.8 68.935,92.625 73.55,92.625 74.3,93.375 DD2.68
RF_TX: DD2.65 XP4.9 | length 13.1
  Top Layer w0.25: XP4.9 64.81,96.75 71.45,96.75 73.325,94.875 DD2.65
RS485_A: FU3.2 XP5.1 | length 4.4
  Top Layer w1: XP5.1 FU3.2
RS485_B: FU4.2 XP5.2 | length 4.4
  Top Layer w1: XP5.2 FU4.2
RS485_EN: DD2.63 U1.2 U1.3 | length 33.4
  Top Layer w0.25: v1(74.725,105.25) 74.075,105.25 72.15,103.325 72.15,97.323 73.598,95.875 DD2.63
  Top Layer w0.5: v1(86.175,107.3) 87.77,105.705 U1.2 90.47,105.705 90.75,105.425 90.75,104.8 90.385,104.435 U1.3
  Bottom Layer w0.5: v1(74.725,105.25) 76.35,106.875 85.75,106.875 v1(86.175,107.3)
RXD: DD2.80 XP3.3 | length 18.2
  Top Layer w0.25: XP3.3 74.85,72.59 74.85,75.325 73.9,76.275 73.9,86.825 74.45,87.375 DD2.80
RXD_485: DD2.59 U1.1 | length 23.5
  Top Layer w0.25: v1(77.45,104.8) 76.725,104.075 76.725,102.3 77.85,101.175 DD2.59
  Top Layer w0.5: v1(87.4,108.25) 87.4,107.25 87.675,106.975 U1.1
  Bottom Layer w0.5: v1(77.45,104.8) 78.125,105.475 81.865,105.475 82.895,104.445 86.695,104.445 87.4,105.15 v1(87.4,108.25)
SCK: DD2.47 DD3.6 | length 17.9
  Top Layer w0.25: v1(83.275,109.575) 83.85,109 DD2.47
  Top Layer w0.5: DD3.6 84.285,113.635 v1(84.3,113.65)
  Bottom Layer w0.5: v1(83.275,109.575) 83.275,112.625 v1(84.3,113.65)
SS: DD2.48 DD3.1 | length 29.4
  Top Layer w0.25: DD3.1 72.775,116.175 71.65,115.05 71.65,111.099 72.624,110.125 81.2,110.125 83.35,107.975 DD2.48
TST: C6.1 DD2.41 J2.1@96.375,75.475 R3.1 | length 36.9
  Top Layer w0.25: DD2.41 86.85,99.8 87.4,100.35 88.225,100.35 91.5,97.075 93.125,97.075 v1(93.225,96.975)
  Top Layer w0.5: v1(93.175,92.125) 93.175,89.675 v1(95.4,87.45) ; C6.1 96.35,75.5 96.375,75.475 96.4,75.45 R3.1 ; v1(95.275,78.675) v1(95.275,83.475)
  Bottom Layer w0.5: v1(93.175,92.125) 93.225,92.175 v1(93.225,96.975) ; v1(95.275,78.675) 96.375,77.575 J2.1@96.375,75.475 ; v1(95.275,83.475) 95.4,83.6 v1(95.4,87.45)
TXD: DD2.79 R1.1 | length 14.5
  Top Layer w0.25: v1(72.975,79.825) 72.975,86.85 74,87.875 DD2.79
  Top Layer w0.5: R1.1 76.1,79.825 v1(76.15,79.875)
  Bottom Layer w0.5: v1(72.975,79.825) 76.1,79.825 v1(76.15,79.875)
TXD_485: DD2.60 U1.4 | length 22.4
  Top Layer w0.25: v1(76,104.925) 76.025,104.9 76.025,102.15 77.35,100.825 DD2.60
  Top Layer w0.5: v1(86.125,105.675) 87.125,104.675 87.125,103.825 87.785,103.165 U1.4
  Bottom Layer w0.5: v1(76,104.925) 77.25,106.175 82.155,106.175 83.185,105.145 85.57,105.145 86.125,105.7 v1(86.125,105.675)
VIN: VD10.1 XP1.2 | length 6.6
  Top Layer w1.4: XP1.2 118.8,93.45 120.1,92.15 VD10.1
VIN_F: C20.2 C21.1 DA1.2 VT1.3 | length 2.1
  Top Layer w0.25: C21.1 DA1.2
  other v1: 125.7,65.8 127.675,65.8 129.65,65.8 131.625,65.8 133.6,65.8 125.7,67.775 127.675,67.775 129.65,67.775 131.625,67.775 125.7,69.75 127.675,69.75 129.65,69.75 125.7,71.725 127.675,71.725 129.65,71.725 132.275,73.05 133.775,73.05 135.275,73.05 136.775,73.05 138.275,73.05 139.375,74.55 139.375,76.05 139.375,77.55 139.375,79.05
pads on no net: DA1.3 DA1.6 DD2.1 DD2.2 DD2.3 DD2.4 DD2.5 DD2.6 DD2.7 DD2.11 DD2.13 DD2.15 DD2.16 DD2.17 DD2.18 DD2.22 DD2.23 DD2.25 DD2.26 DD2.27 DD2.28 DD2.29 DD2.30 DD2.31 DD2.32 DD2.35 DD2.36 DD2.39 DD2.40 DD2.44 DD2.49 DD2.50 DD2.51 DD2.61 DD2.62 DD2.69 DD2.70 DD2.71 DD2.72 DD2.73 DD2.74 DD2.75 DD2.76 REPER1.1 REPER2.1 VD11.2 VD13.2 XP3.1 XP3.4 XP3.6 XP4.2 XP4.3 XP4.4 XP4.5

## Polygon pours and split planes (outlines as drawn)
NetR10_2 on Top Layer "NETR10_2_L01_P002" (hatched 90Degree grid 0.15 track 0.2, remove dead copper, pour order 2): 127.05,82.375 127.05,84.2 127.35,84.5 127.75,84.9 129.45,84.9 129.85,84.9 130.025,84.725 130.125,84.625 130.125,83.575 130.125,82.925 130.375,82.675 130.525,82.525 131.1,82.525 131.1,80.55 130.875,80.325 127.05,80.325
VIN_F on Top Layer "VIN_F_L01_P004" (hatched 90Degree grid 0.15 track 0.2, remove dead copper, pour order 4): 131.375,79.625 140.293,79.625 140.293,64.326 124.75,64.326 124.75,72.625 128.05,72.625 131.375,72.625
VIN_F on Top Layer "VIN_F_L01_P008" (hatched 90Degree grid 0.15 track 0.2, remove dead copper, pour order 8): 124.75,72.625 122.8,70.675 121,70.675 121,69.625 121,64.326 124.75,64.326
VIN_F on Top Layer "VIN_F_L01_P012" (hatched 90Degree grid 0.15 track 0.2, remove dead copper, pour order 12): 121,64.326 114.25,64.326 114.25,66.425 115.575,66.425 116,66 117.225,66 121,66
NetC17_1 on Top Layer "NETC17_1_L01_P014" (hatched 90Degree grid 0.15 track 0.2, remove dead copper, pour order 14): 114.5,73.2 114.5,74.15 115.05,74.7 116.325,75.975 118.45,75.975 119.95,75.975 120.6,76.625 120.6,78.125 120.6,78.575 117.65,78.575 117.175,78.1 117.1,78.025 111.475,78.025 109.15,78.025 108.775,77.65 108.775,75.9 108.775,73.3 111.575,70.5 113.125,70.5 113.125,71.3 113.125,71.65 113.925,71.65 114.5,71.65
+3V3 on Top Layer "+3V3_L01_P016" (hatched 90Degree grid 0.15 track 0.2, remove dead copper, pour order 16): 110.125,80.65 115.4,80.65 117.475,80.65 118.325,81.5 118.425,81.6 118.425,82.725 118.425,83.45 118.65,83.675 118.675,83.7 118.675,84.25 118.675,85.2 118.35,85.525 117.75,86.125 117.75,87.15 117.75,88 117.625,88.125 114.875,88.125 114.25,88.125 113.775,87.65 113.225,87.1 113.225,85.725 113.225,85.375 112.8,84.95 112.5,84.65 111.65,84.65 111.325,84.65 109.5,82.825 109.15,82.475 109.15,80.65
GND on Top Layer "GND_L01_P020" (hatched 90Degree grid 0.15 track 0.2, remove dead copper, pour order 20): 58.293,120.426 64.993,120.426 64.993,125.426 100.293,125.426 100.293,120.426 122.293,120.426 122.293,116.426 140.293,116.426 140.293,64.326 76.293,64.326 76.293,68.326 58.293,68.326
VIN_F on Bottom Layer "VIN_F_L02_P006" (hatched 90Degree grid 0.15 track 0.2, remove dead copper, pour order 6): 131.375,79.625 140.293,79.625 140.293,64.326 124.75,64.326 124.75,72.625 128.05,72.625 131.375,72.625
VIN_F on Bottom Layer "VIN_F_L02_P010" (hatched 90Degree grid 0.15 track 0.2, remove dead copper, pour order 10): 124.75,72.625 122.825,70.7 122.8,70.675 120.975,70.675 120.975,64.326 124.75,64.326
GND on Bottom Layer "GND_L02_P022" (hatched 90Degree grid 0.15 track 0.2, remove dead copper, pour order 22): 58.293,68.326 58.293,120.426 64.993,120.426 64.993,125.426 100.293,125.426 100.293,120.426 122.293,120.426 122.293,116.426 140.242,116.426 140.293,116.375 140.293,64.326 76.293,64.326 76.293,68.326 58.293,68.326

## Keep-outs
Keep-Out Layer:
  lines w0.1: 58.293,68.326 58.293,120.426 64.993,120.426 64.993,125.426 100.293,125.426 100.293,120.426 122.293,120.426 122.293,116.426 140.293,116.426 140.293,64.326 100.293,64.326 76.293,64.326 76.293,68.326 58.293,68.326

## Other copper
Top Layer:
  pour cut-out: 109.15,80.65 109.15,78.025 117,78.025 117,80.65
  pour cut-out: 97.4,103.95 97.4,101.475 100.2,101.475 100.175,101.5 100.175,103.95
  pour cut-out: 102.4,103.95 102.4,101.475 105.2,101.475 105.175,101.5 105.175,103.95
  pour cut-out: 107.375,103.95 107.375,101.475 110.175,101.475 110.15,101.5 110.15,103.95
  pour cut-out: 112.4,103.95 112.4,101.475 115.2,101.475 115.175,101.5 115.175,103.95
Bottom Layer:
  pour cut-out: 133.8,68.063 133.85,68.662 134.15,69.612 134.712,70.3 135.437,70.825 135.937,70.987 136.412,71.112 136.637,71.15 136.762,71.15 137.45,71.112 138.062,70.85 138.259,70.766 138.409,70.616 138.787,70.35 139.45,69.575 139.675,68.975 139.725,68.662 139.759,68.451 139.798,68.063 139.759,67.725 139.562,66.975 139.162,66.25 138.5,65.687 138.037,65.4 137.45,65.212 137.037,65.125 136.562,65.125 135.562,65.35 134.762,65.875 134.2,66.587 134.012,66.95 133.85,67.388
  pour cut-out: 133.8,112.062 133.85,112.662 134.15,113.612 134.712,114.3 135.437,114.825 135.937,114.987 136.412,115.112 136.637,115.15 136.762,115.15 137.45,115.112 138.062,114.85 138.259,114.766 138.409,114.616 138.787,114.35 139.45,113.575 139.675,112.975 139.725,112.662 139.759,112.451 139.798,112.062 139.759,111.725 139.562,110.975 139.162,110.25 138.5,109.687 138.037,109.4 137.45,109.212 137.037,109.125 136.562,109.125 135.562,109.35 134.762,109.875 134.2,110.587 134.012,110.95 133.85,111.387
  pour cut-out: 88.8,119.013 88.85,119.612 89.15,120.562 89.712,121.25 90.437,121.775 90.937,121.937 91.412,122.062 91.637,122.1 91.762,122.1 92.45,122.062 93.062,121.8 93.259,121.716 93.409,121.566 93.787,121.3 94.45,120.525 94.675,119.925 94.725,119.612 94.759,119.401 94.798,119.013 94.759,118.675 94.562,117.925 94.162,117.2 93.5,116.637 93.037,116.35 92.45,116.162 92.037,116.075 91.562,116.075 90.562,116.3 89.762,116.825 89.2,117.537 89.012,117.9 88.85,118.338
  pour cut-out: 58.8,116.463 58.85,117.062 59.15,118.012 59.712,118.7 60.437,119.225 60.937,119.387 61.412,119.512 61.637,119.55 61.762,119.55 62.45,119.512 63.062,119.25 63.259,119.166 63.409,119.016 63.787,118.75 64.45,117.975 64.675,117.375 64.725,117.062 64.759,116.851 64.798,116.463 64.759,116.125 64.562,115.375 64.162,114.65 63.5,114.087 63.037,113.8 62.45,113.612 62.037,113.525 61.562,113.525 60.562,113.75 59.762,114.275 59.2,114.987 59.012,115.35 58.85,115.788
  pour cut-out: 58.8,72.462 58.85,73.062 59.15,74.012 59.712,74.7 60.437,75.225 60.937,75.387 61.412,75.512 61.637,75.55 61.762,75.55 62.45,75.512 63.062,75.25 63.259,75.166 63.409,75.016 63.787,74.75 64.45,73.975 64.675,73.375 64.725,73.062 64.759,72.851 64.798,72.462 64.759,72.125 64.562,71.375 64.162,70.65 63.5,70.087 63.037,69.8 62.45,69.612 62.037,69.525 61.562,69.525 60.562,69.75 59.762,70.275 59.2,70.987 59.012,71.35 58.85,71.787
  pour cut-out: 109.15,80.675 109.15,78.05 117,78.05 117,80.675

## Silkscreen, mask and mechanical layers (free items; w line width, h text height)
Top Overlay:
  circle w0.2: c91.793,119.076 r3
  circle w0.2: c61.793,116.526 r3
  circle w0.2: c61.793,72.526 r3
  circle w0.2: c136.793,68.126 r3
  circle w0.2: c136.793,112.126 r3
Bottom Overlay:
  circle w0.2: c77.725,68.725 r0.18
  circle w0.2: c60.625,81.675 r0.224
  text "RF_ACTIVITY" at 69.65,109.325 h1
  text "CAN" at 131.475,106 h1
  text "120 Ohm" at 132.975,104.45 h1
  text "+VIN" at 118.225,101.275 h1 r270
  text "RS485_B" at 98.35,101.25 h1 r270
  text "RS485_A" at 103.375,101.25 h1 r270
  text "CAN_L" at 108.325,101.25 h1 r270
  text "CAN_H" at 113.3,101.25 h1 r270
  text "GND" at 123.4,101.25 h1 r270
  text "CAN" at 103.625,82.6 h1 r270
  text "RS485" at 97.825,80.625 h1 r270
  text "POWER" at 109.15,80.6 h1 r270
  text "1" at 79.075,70.625 h1